# Altium PCB HMC1053-array.PcbDoc (part 1 of 4)
Units mm, origin at the board's own origin, x right, y up, seen from the top; angles counter-clockwise.
Board outline 90 x 90 mm, 4 copper layers (Top Layer (Signal), Int1 (GND), Int2 (Signal), Bottom Layer (Signal)), stack 1.586 mm thick; 151 components, 306 nets, 1178 pads, 350 vias.
Unrouted connection lines stored in the file: 80.
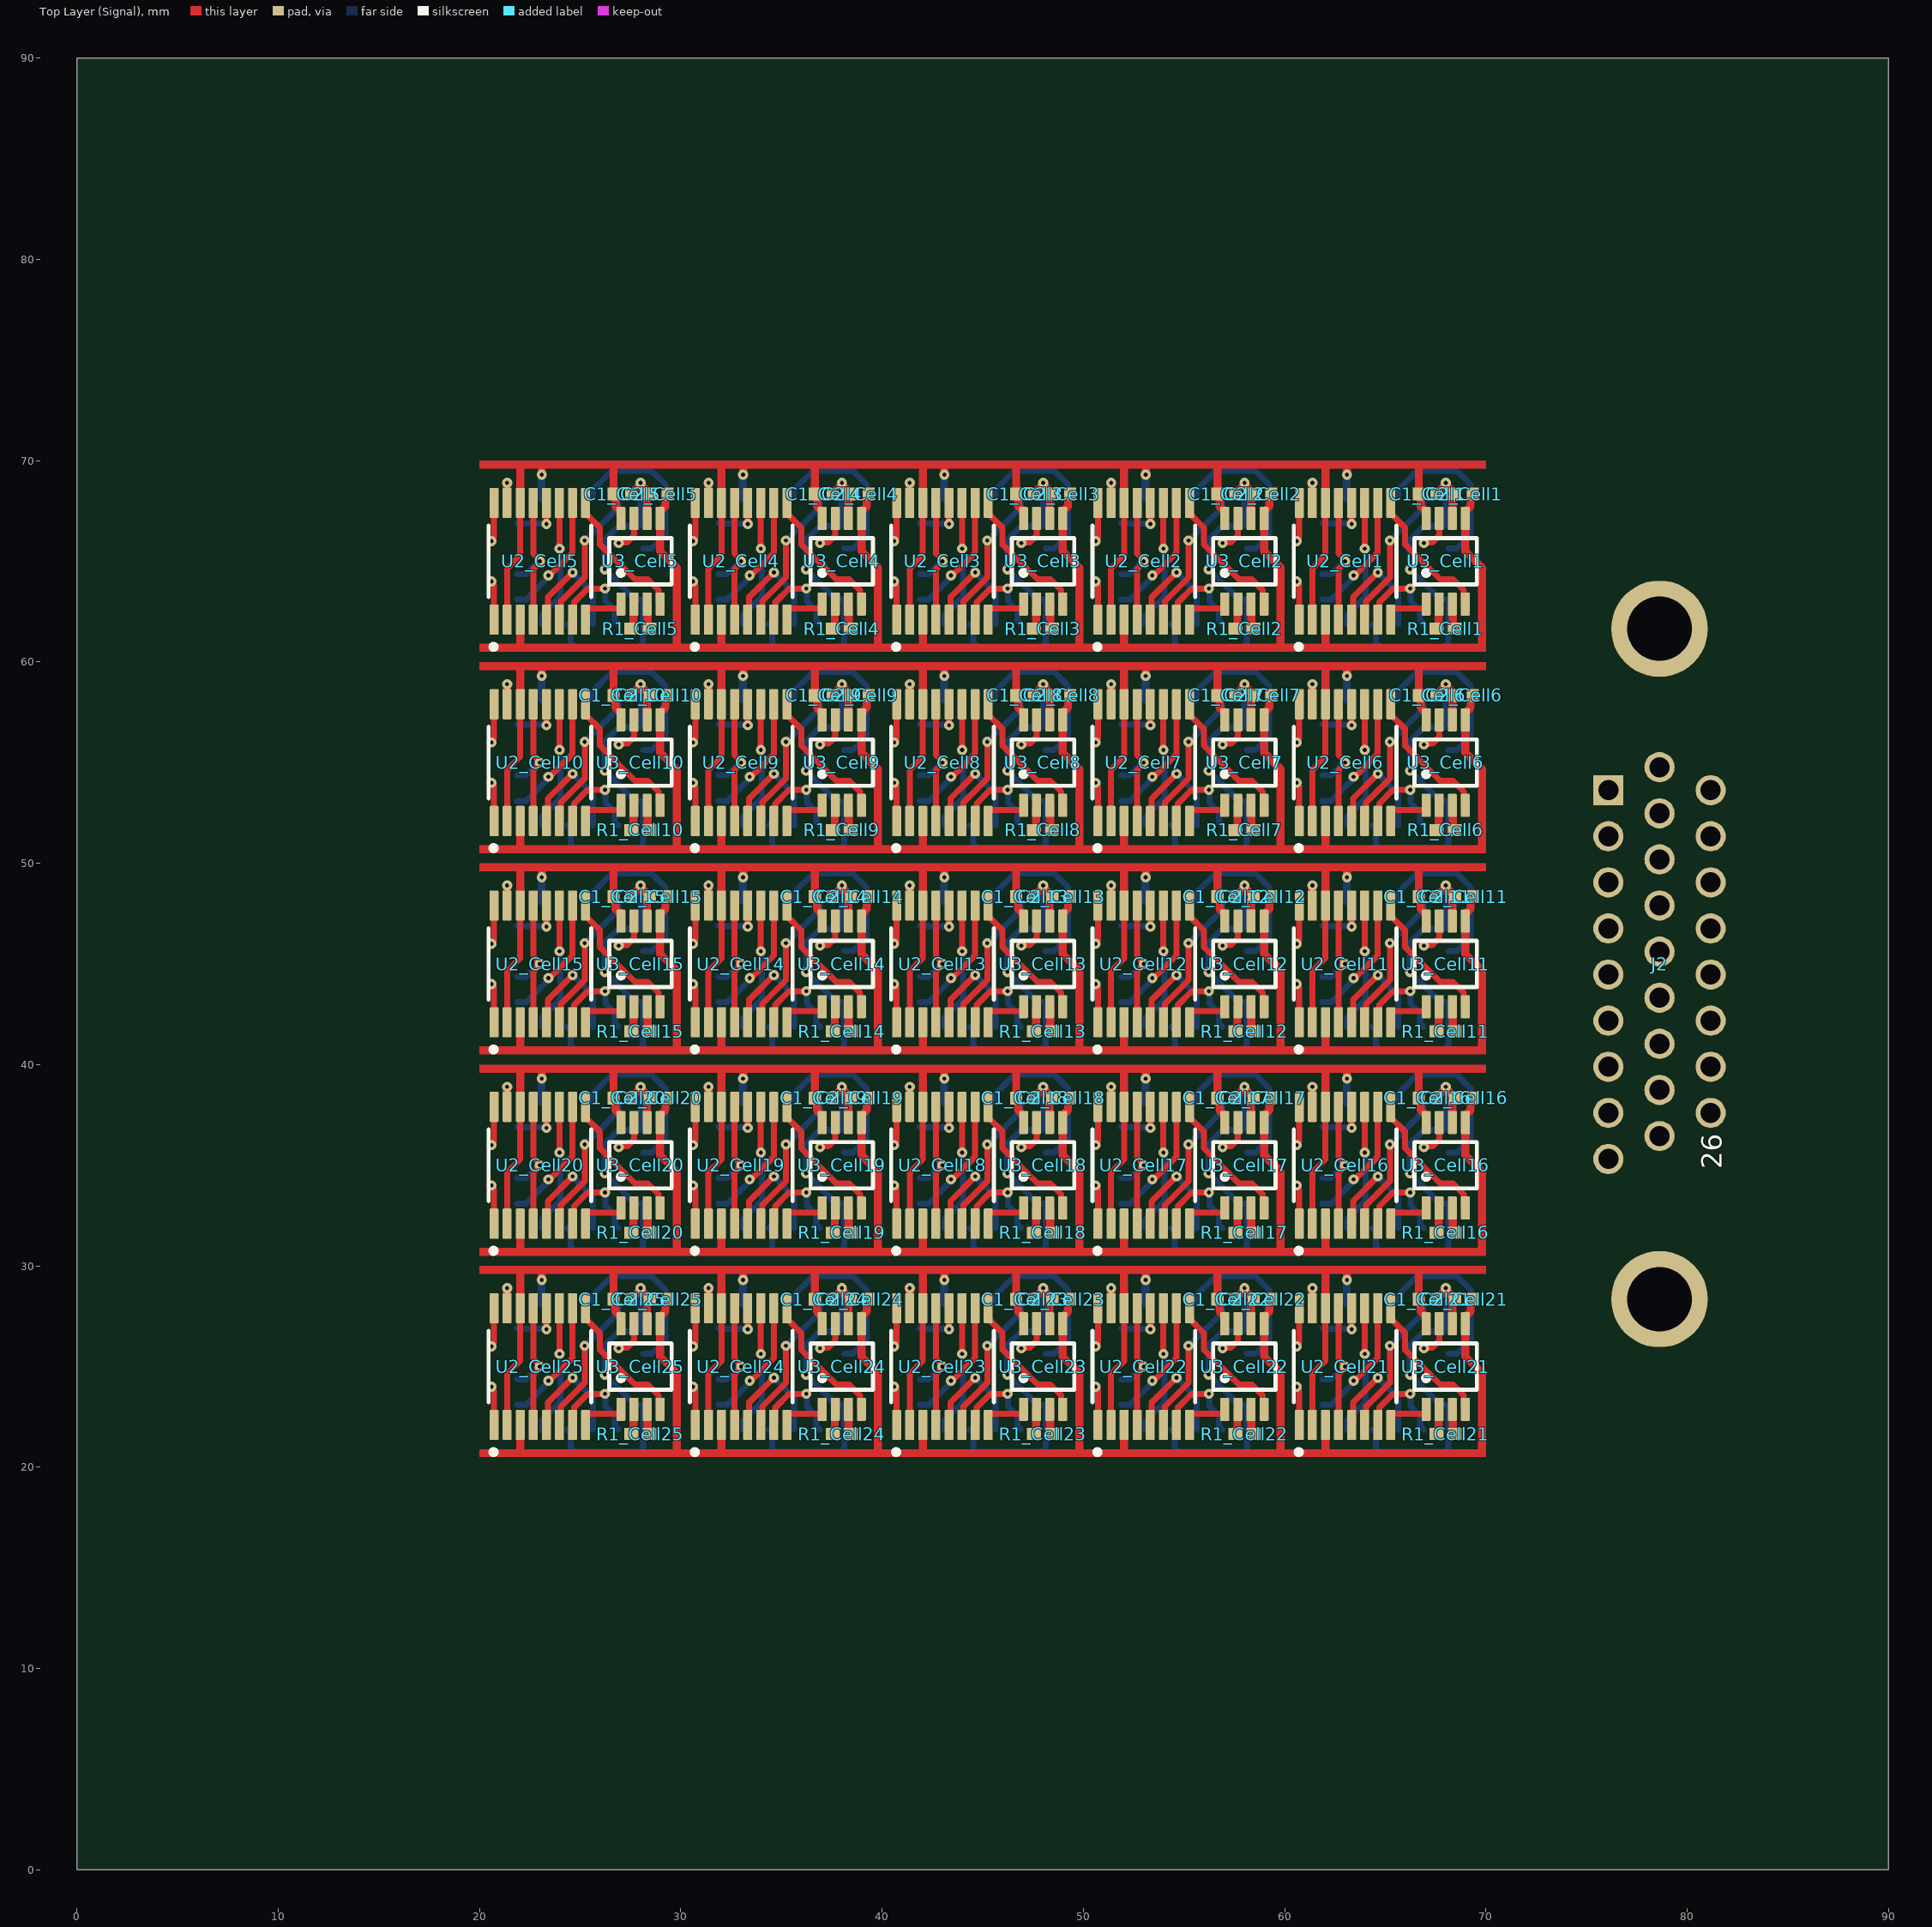
[diagram p0: Top Layer (Signal) view]
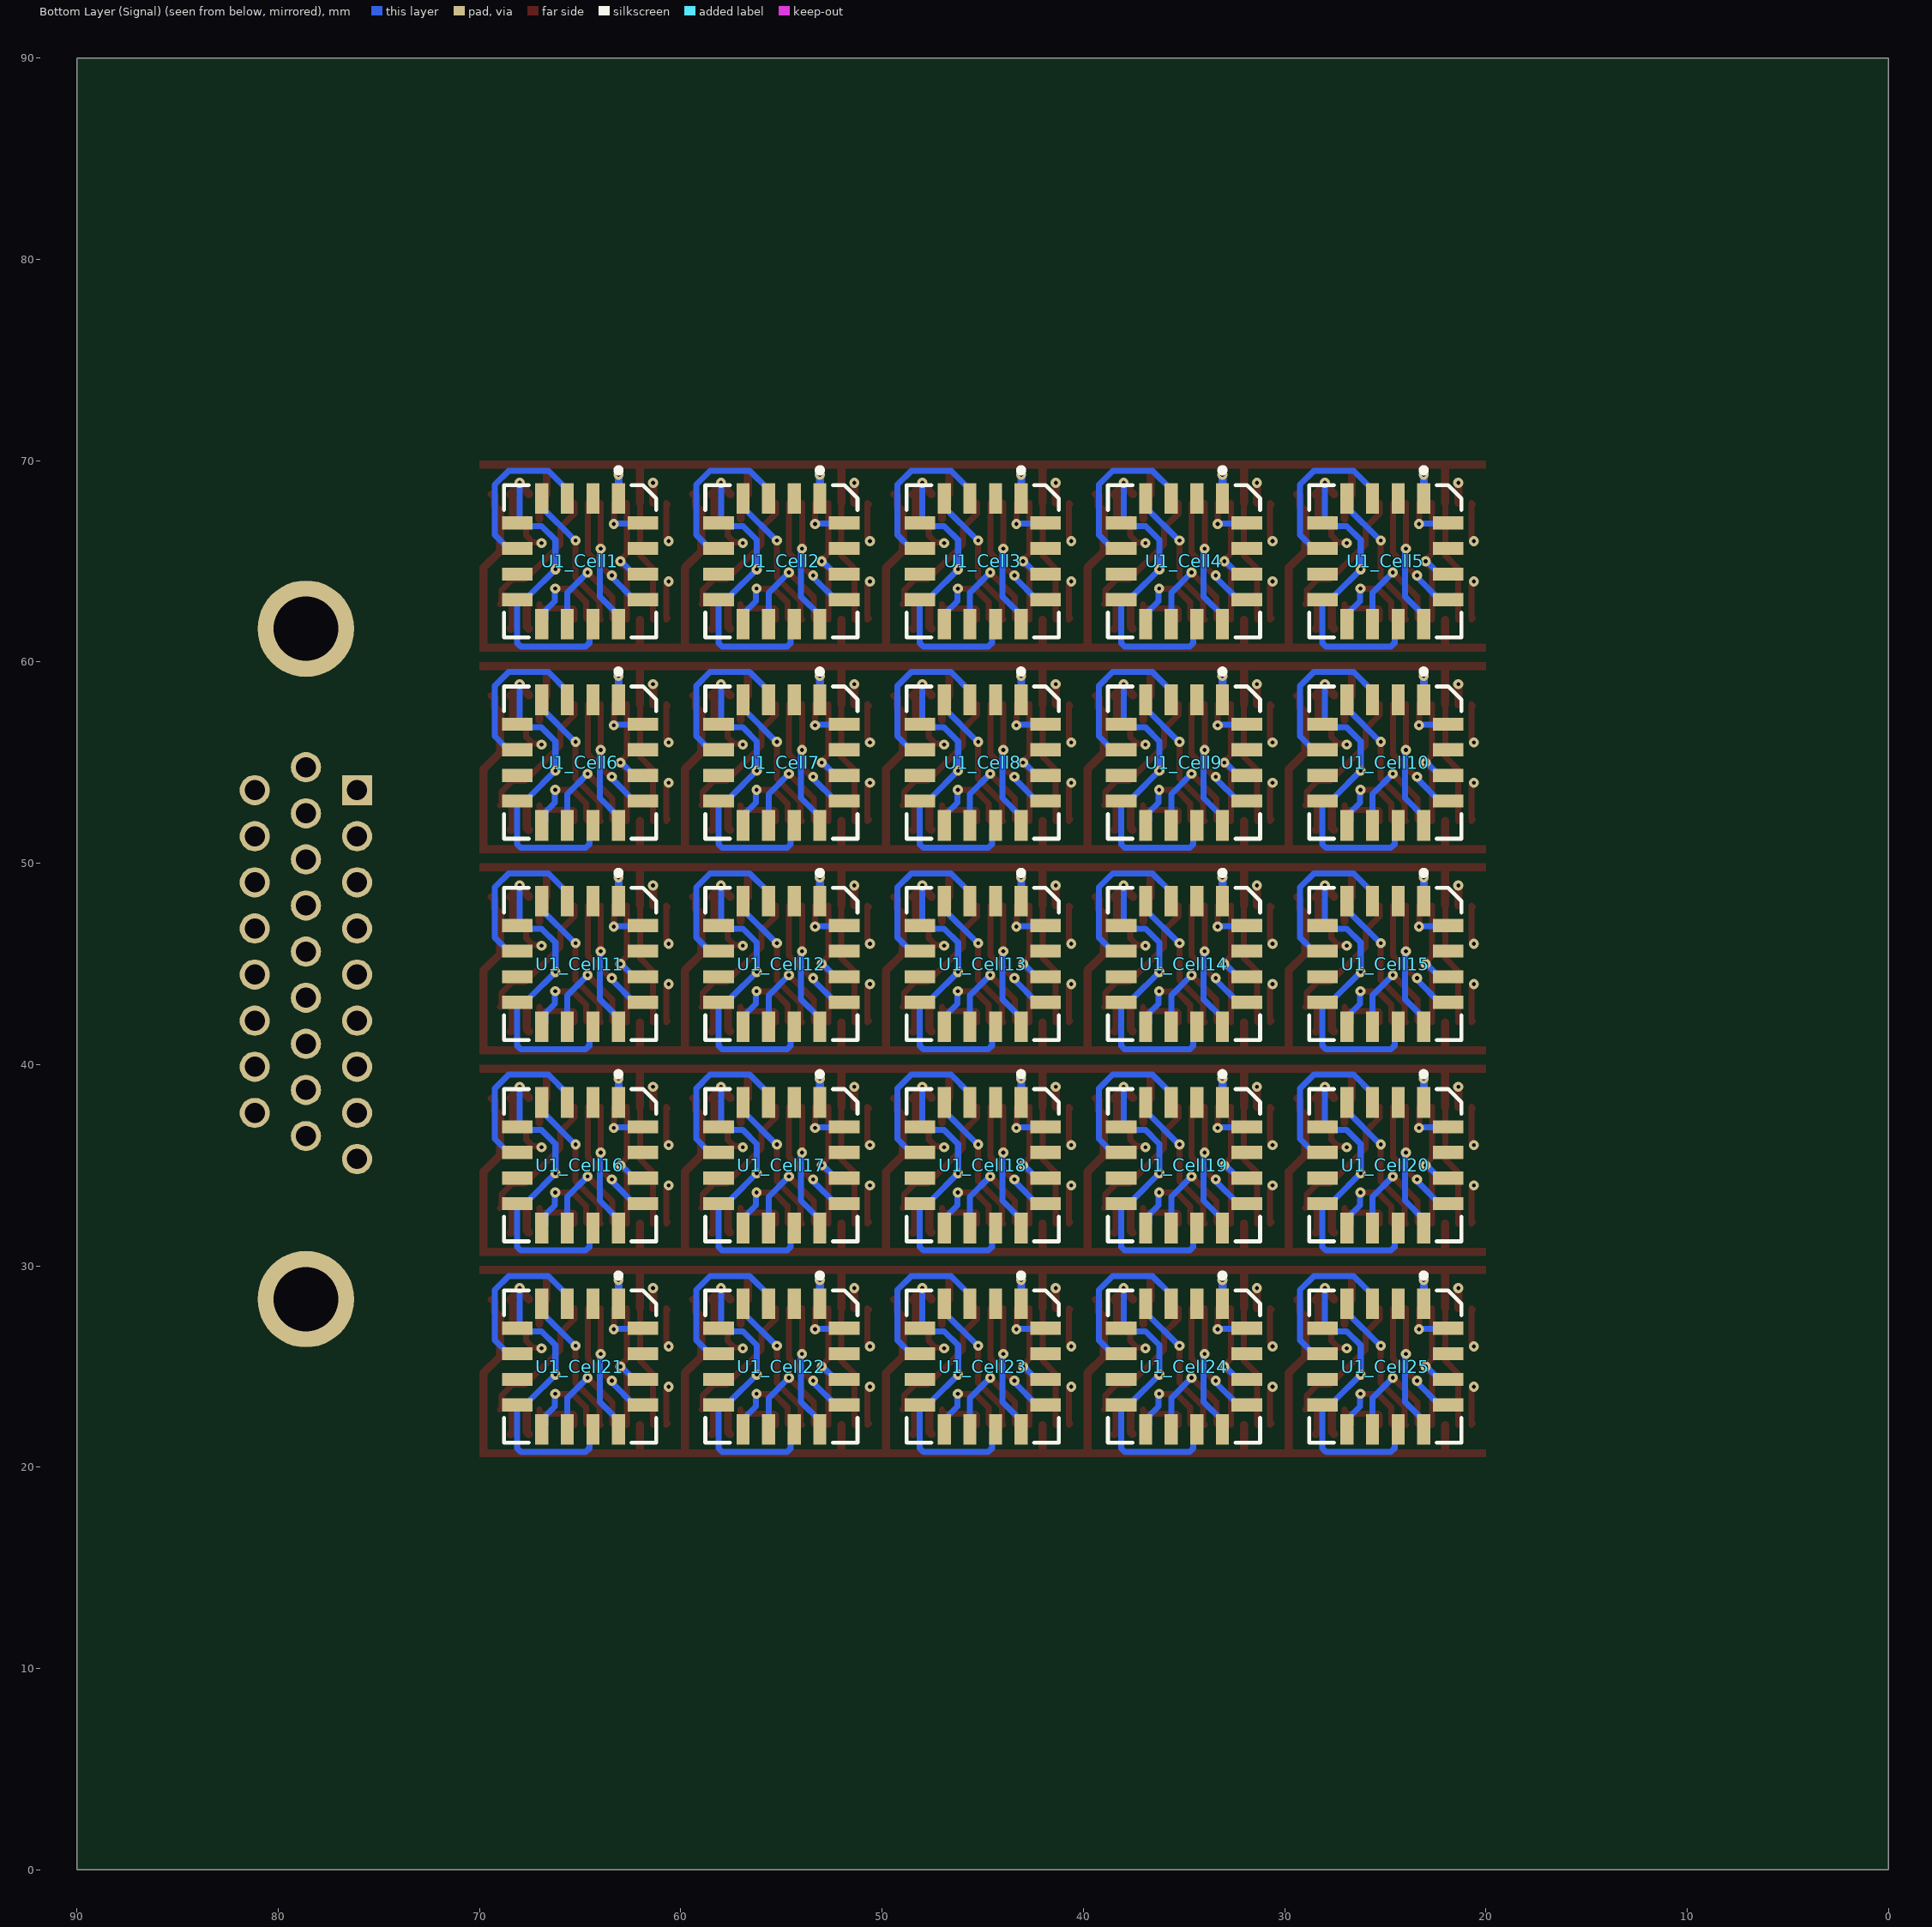
[diagram p1: Bottom Layer (Signal) view, seen from below]
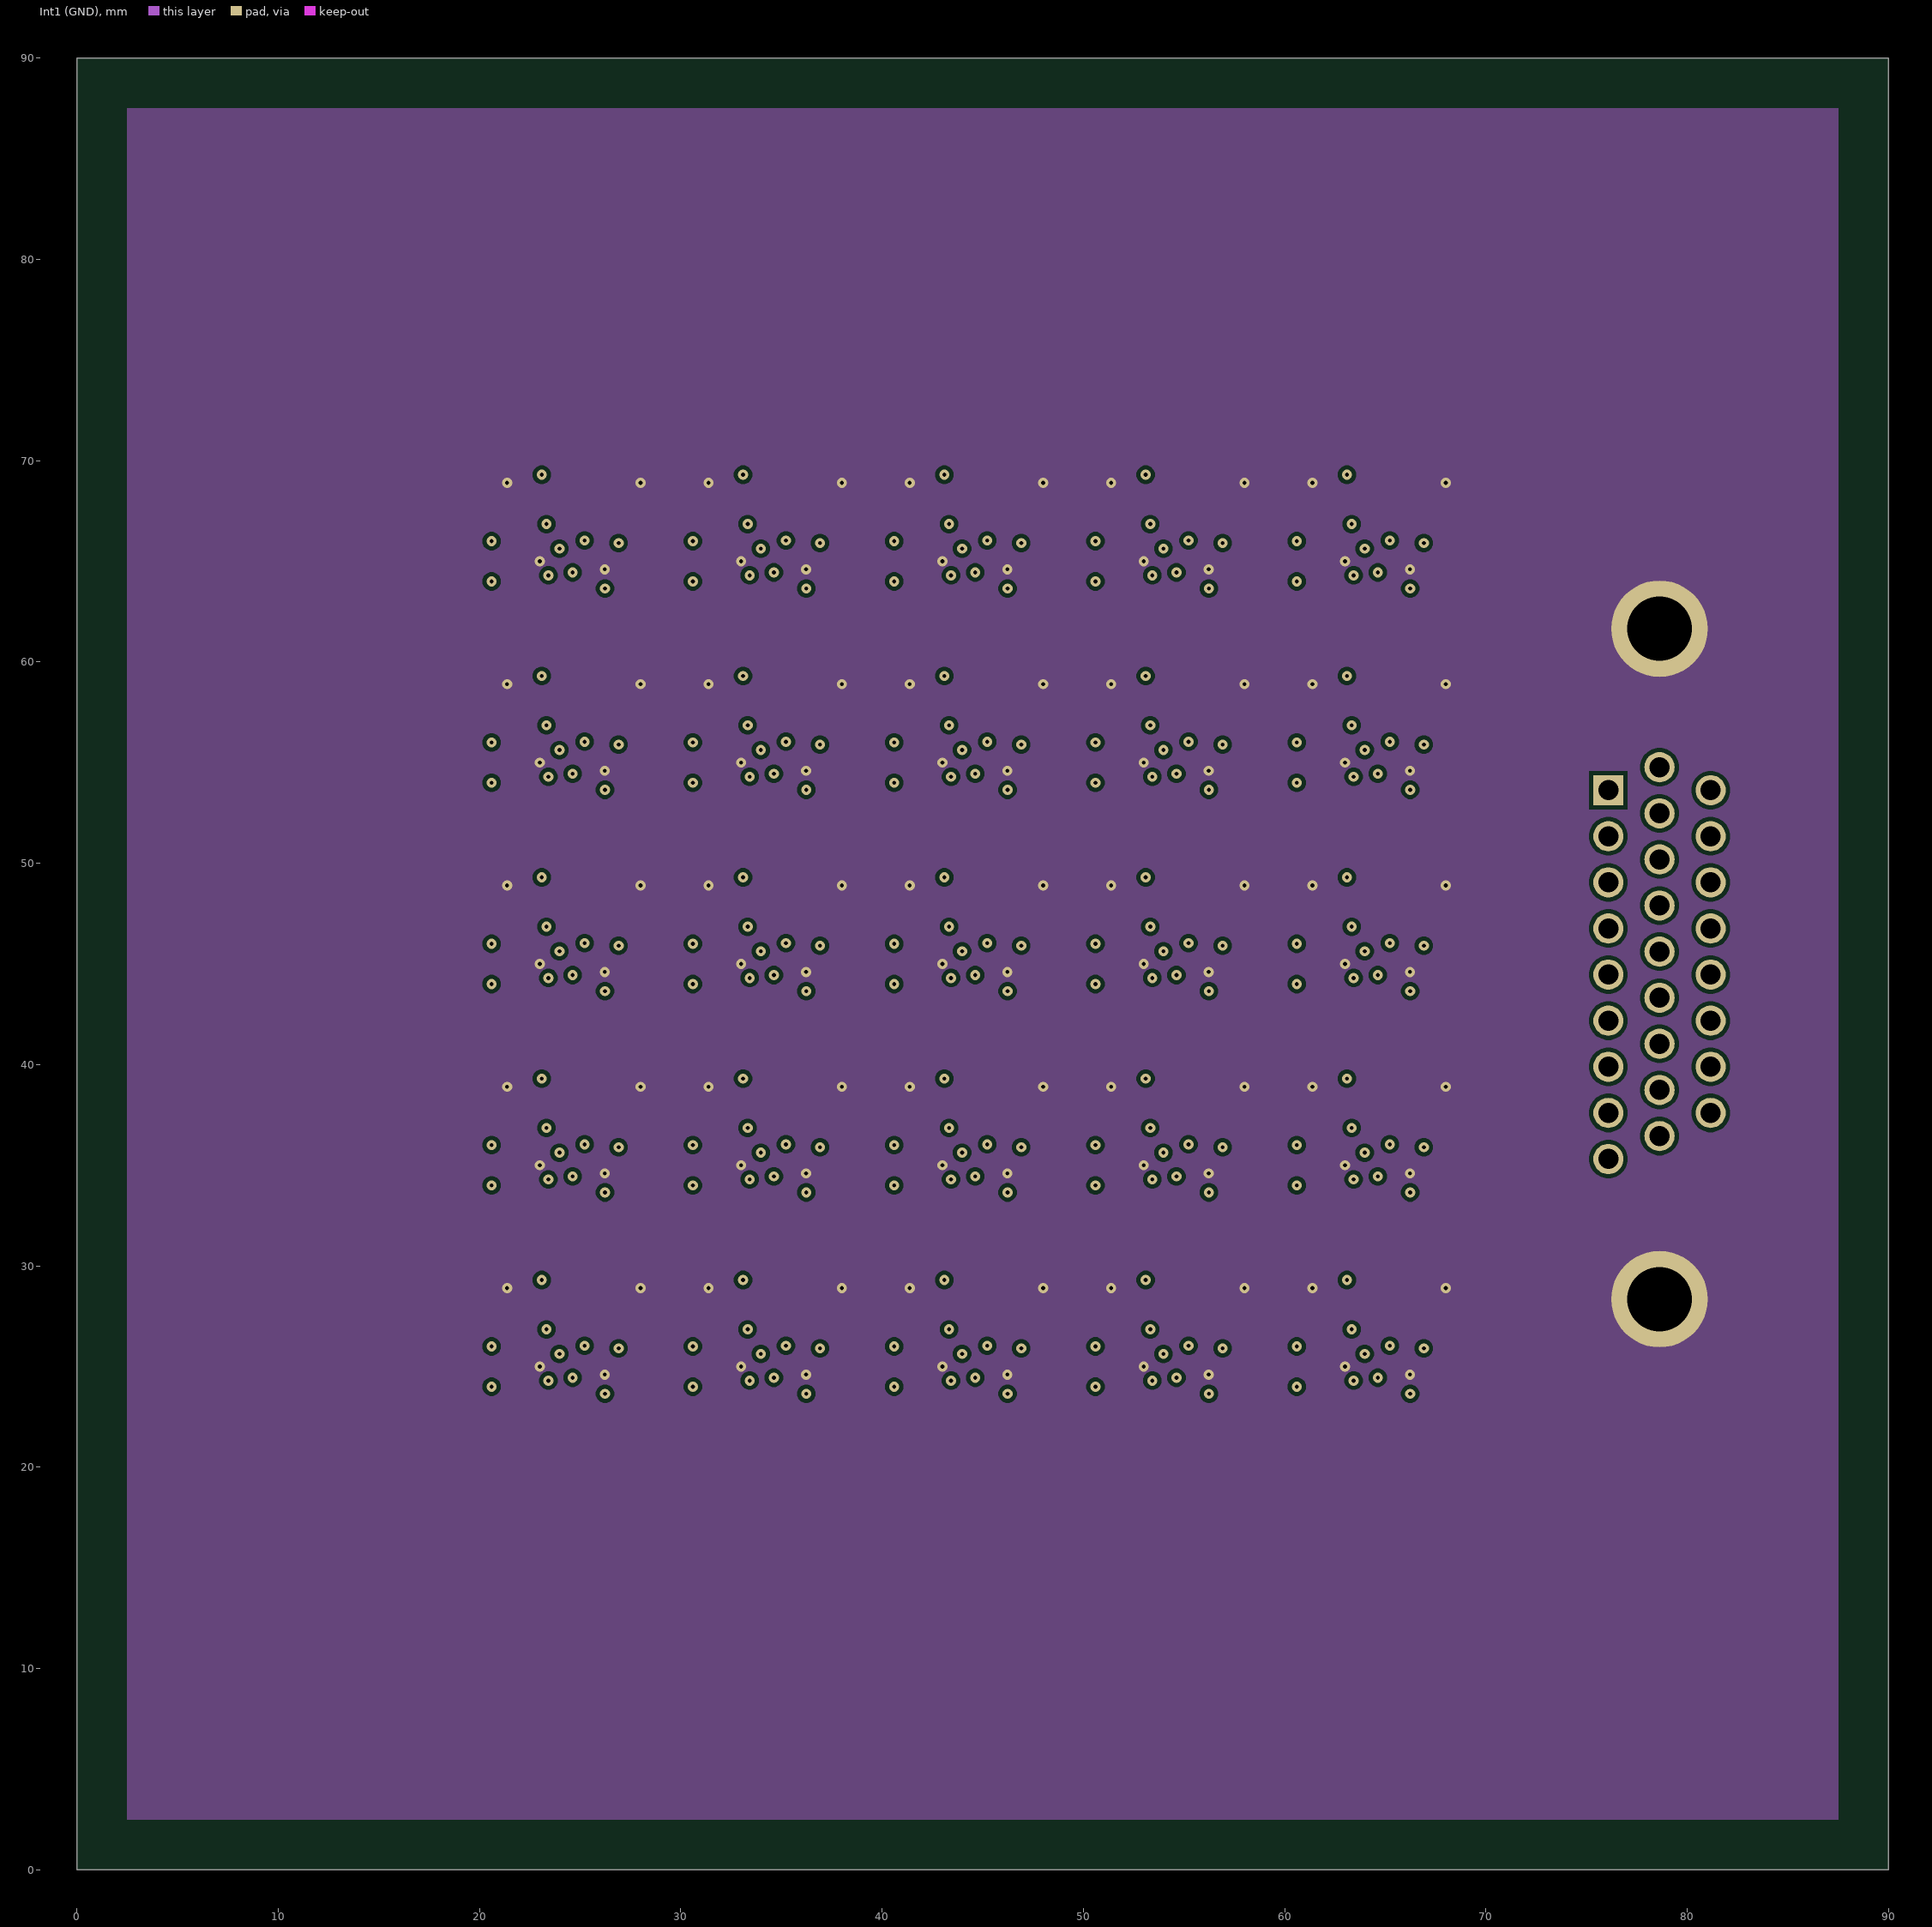
[diagram p2: Int1 (GND)]
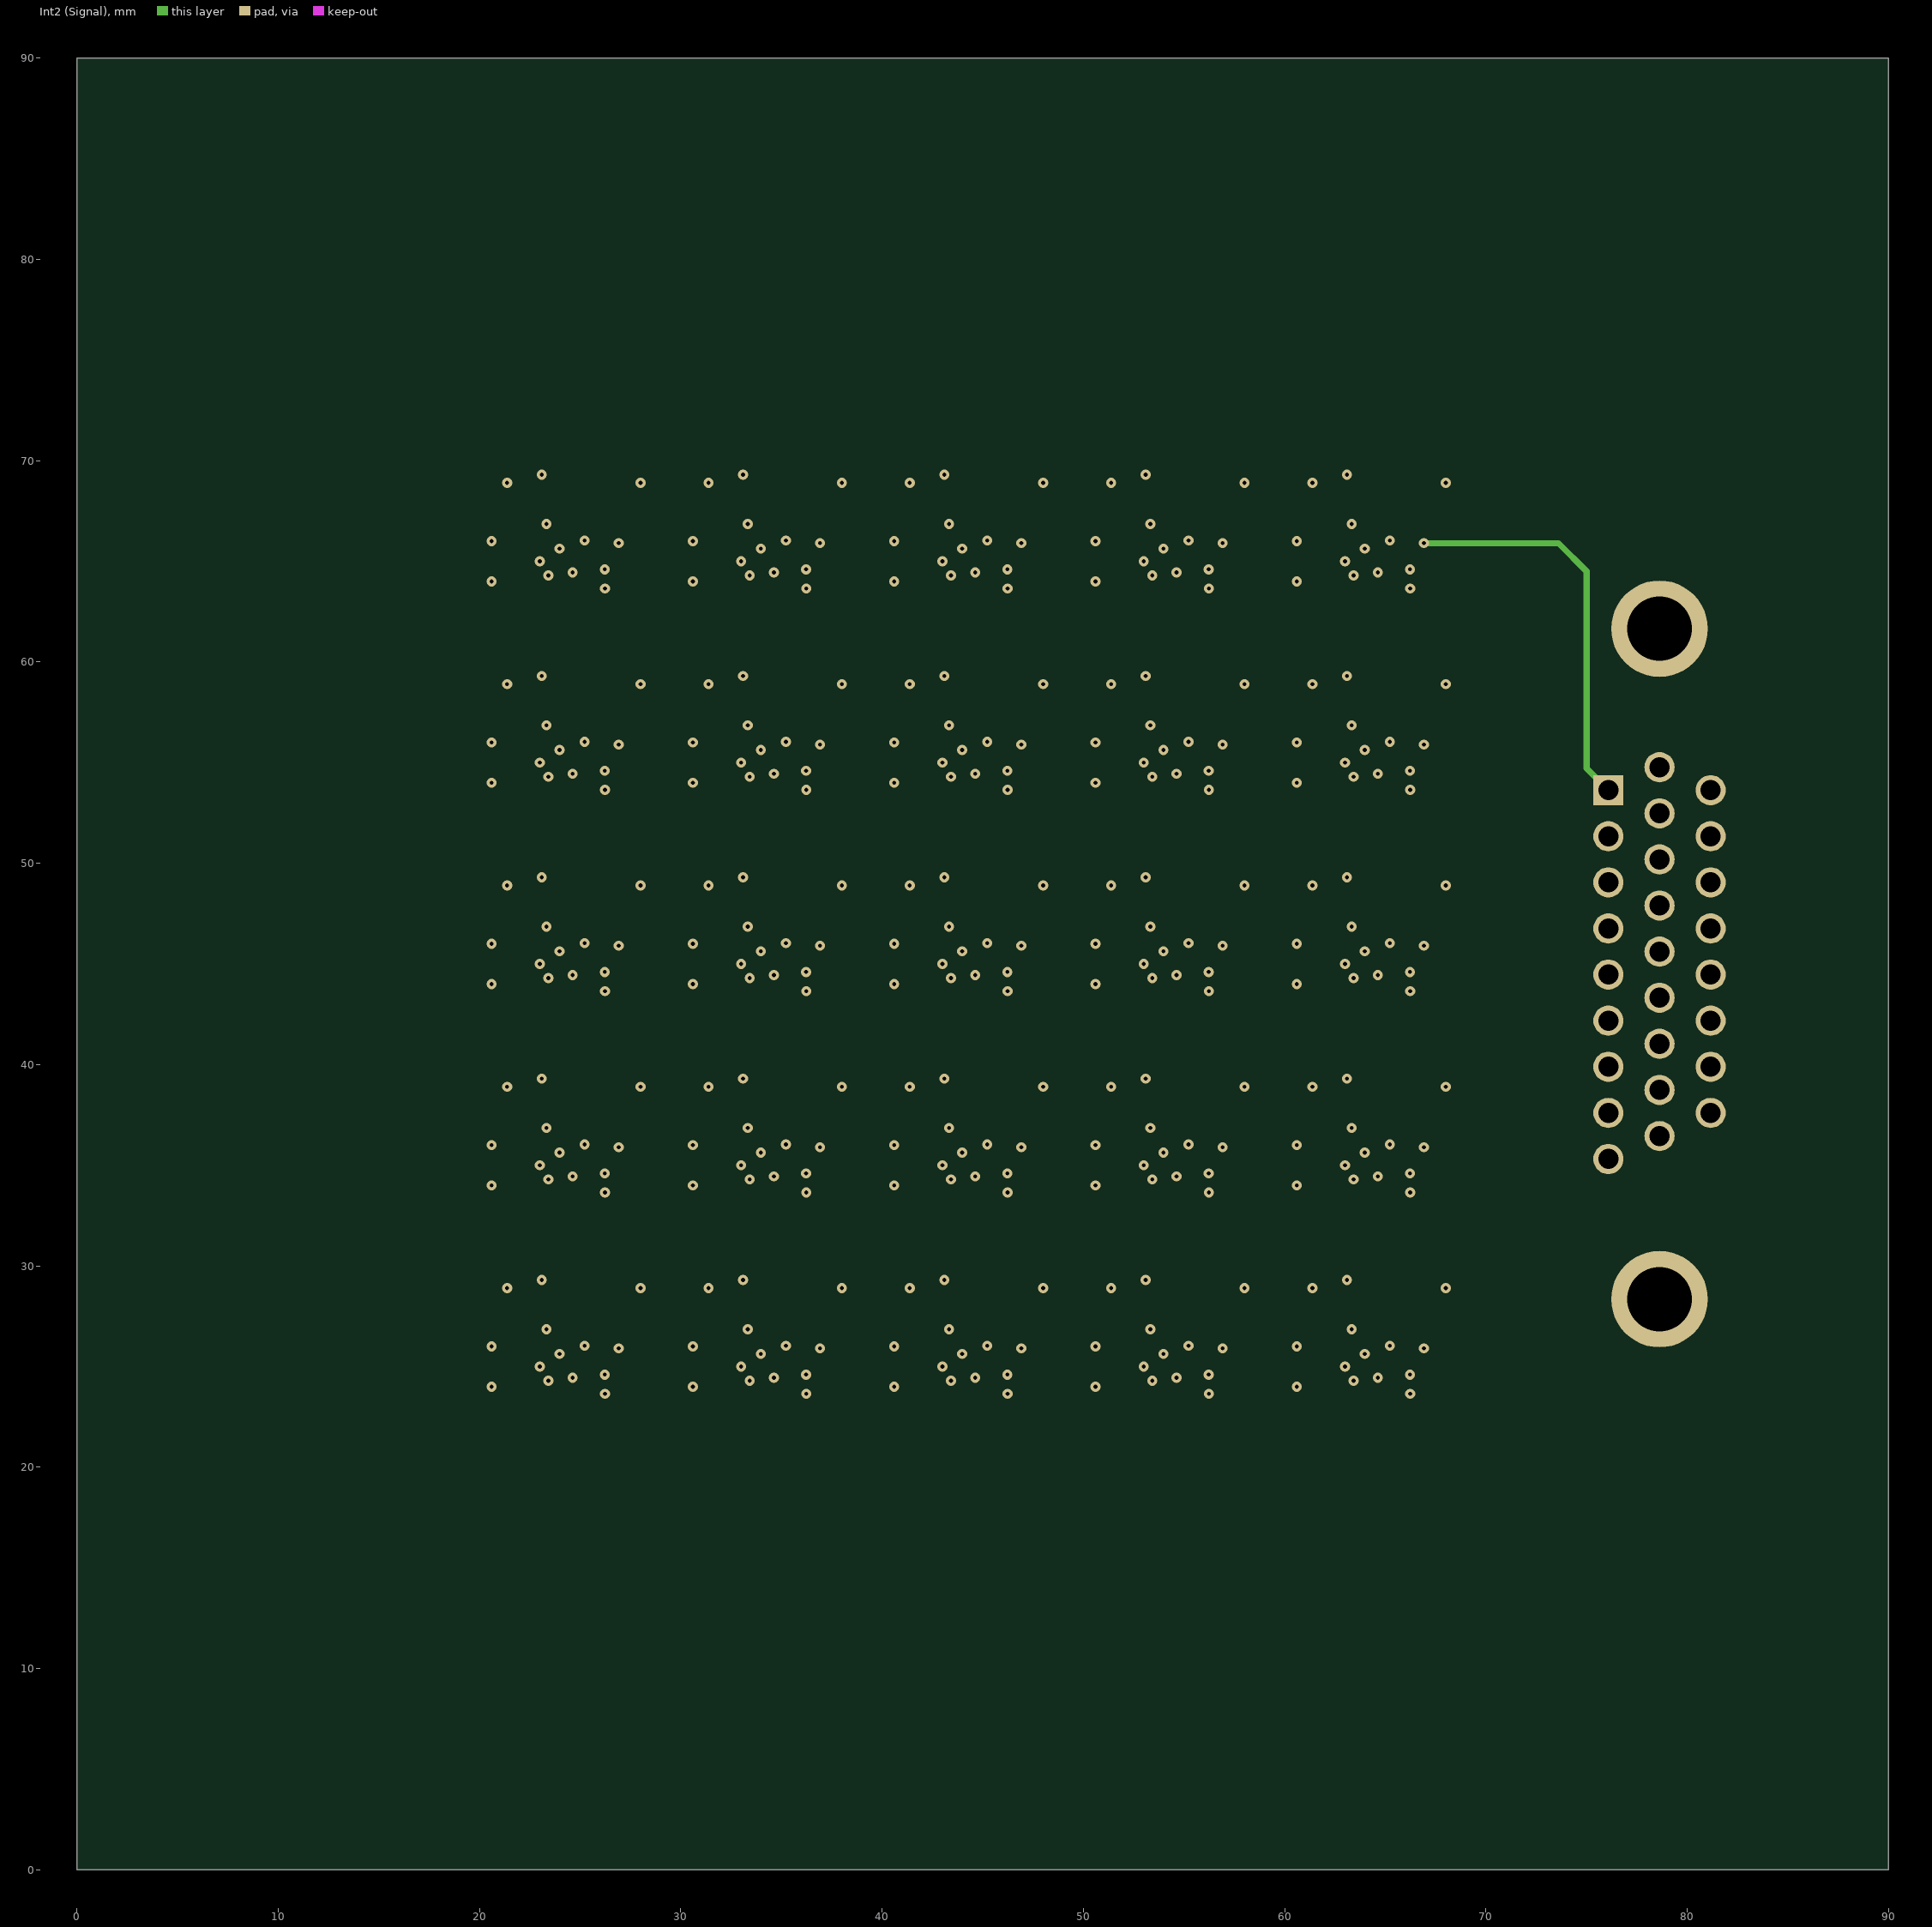
[diagram p3: Int2 (Signal)]

## Layer stack, top to bottom
Top Solder: solder mask 0.0254, SM-001, Dk 4
Top Layer (Signal): signal copper 0.035
Dielectric 1: prepreg 0.2104, PP-017, Dk 4.6
Int1 (GND): signal copper 0.0152
Dielectric 3: core 1.065, Core-039, Dk 4.6
Int2 (Signal): signal copper 0.0152
Dielectric 5: prepreg 0.2104, PP-017, Dk 4.6
Bottom Layer (Signal): signal copper 0.035
Bottom Solder: solder mask 0.0254, SM-001, Dk 4

## Board outline
0,0 0,90 90,90 90,0

## Design rules (kind name [scope] priority, off if disabled: settings)
Clearance [All] p1: gap=0.2 ignorepadtopadclearanceinfootprint=FALSE except(0.127: SMDPad-SMDPad)
HoleSize [All] p1: absolutevalues=TRUE maxlimit=6.3 minlimit=0.2 maxpercent=80.000 minpercent=20.000
PolygonConnect [All] p1: connectstyle=Direct reliefconductorwidth=0.254 reliefentries=4 polygonreliefangle="90 Angle" airgapwidth=0.254
RoomDefinition Cell5 [InComponentClass('Cell5')] p1: confinementstyle=ConfineIn formatcopy=TRUE lockcomponents=FALSE outline 20,60 30,60 30,70 20,70
RoomDefinition Cell4 [InComponentClass('Cell4')] p2: confinementstyle=ConfineIn formatcopy=TRUE lockcomponents=FALSE outline 30,60 40,60 40,70 30,70
RoomDefinition Cell3 [InComponentClass('Cell3')] p3: confinementstyle=ConfineIn formatcopy=TRUE lockcomponents=FALSE outline 40,60 50,60 50,70 40,70
RoomDefinition Cell2 [InComponentClass('Cell2')] p4: confinementstyle=ConfineIn formatcopy=TRUE lockcomponents=FALSE outline 50,60 60,60 60,70 50,70
RoomDefinition Cell7 [InComponentClass('Cell7')] p5: confinementstyle=ConfineIn formatcopy=TRUE lockcomponents=FALSE outline 50,50 60,50 60,60 50,60
RoomDefinition Cell20 [InComponentClass('Cell20')] p6: confinementstyle=ConfineIn formatcopy=TRUE lockcomponents=FALSE outline 20,30 30,30 30,40 20,40
RoomDefinition Cell8 [InComponentClass('Cell8')] p7: confinementstyle=ConfineIn formatcopy=TRUE lockcomponents=FALSE outline 40,50 50,50 50,60 40,60
RoomDefinition Cell12 [InComponentClass('Cell12')] p8: confinementstyle=ConfineIn formatcopy=TRUE lockcomponents=FALSE outline 50,40 60,40 60,50 50,50
RoomDefinition Cell17 [InComponentClass('Cell17')] p9: confinementstyle=ConfineIn formatcopy=TRUE lockcomponents=FALSE outline 50,30 60,30 60,40 50,40
RoomDefinition Cell24 [InComponentClass('Cell24')] p10: confinementstyle=ConfineIn formatcopy=TRUE lockcomponents=FALSE outline 30,20 40,20 40,30 30,30
RoomDefinition Cell19 [InComponentClass('Cell19')] p11: confinementstyle=ConfineIn formatcopy=TRUE lockcomponents=FALSE outline 30,30 40,30 40,40 30,40
RoomDefinition Cell23 [InComponentClass('Cell23')] p12: confinementstyle=ConfineIn formatcopy=TRUE lockcomponents=FALSE outline 40,20 50,20 50,30 40,30
RoomDefinition Cell18 [InComponentClass('Cell18')] p13: confinementstyle=ConfineIn formatcopy=TRUE lockcomponents=FALSE outline 40,30 50,30 50,40 40,40
RoomDefinition Cell14 [InComponentClass('Cell14')] p14: confinementstyle=ConfineIn formatcopy=TRUE lockcomponents=FALSE outline 30,40 40,40 40,50 30,50
RoomDefinition Cell22 [InComponentClass('Cell22')] p15: confinementstyle=ConfineIn formatcopy=TRUE lockcomponents=FALSE outline 50,20 60,20 60,30 50,30
RoomDefinition Cell13 [InComponentClass('Cell13')] p16: confinementstyle=ConfineIn formatcopy=TRUE lockcomponents=FALSE outline 40,40 50,40 50,50 40,50
RoomDefinition Cell10 [InComponentClass('Cell10')] p17: confinementstyle=ConfineIn formatcopy=TRUE lockcomponents=FALSE outline 20,50 30,50 30,60 20,60
RoomDefinition Cell15 [InComponentClass('Cell15')] p18: confinementstyle=ConfineIn formatcopy=TRUE lockcomponents=FALSE outline 20,40 30,40 30,50 20,50
RoomDefinition Cell6 [InComponentClass('Cell6')] p19: confinementstyle=ConfineIn formatcopy=TRUE lockcomponents=FALSE outline 60,50 70,50 70,60 60,60
RoomDefinition Cell16 [InComponentClass('Cell16')] p20: confinementstyle=ConfineIn formatcopy=TRUE lockcomponents=FALSE outline 60,30 70,30 70,40 60,40
RoomDefinition Cell21 [InComponentClass('Cell21')] p21: confinementstyle=ConfineIn formatcopy=TRUE lockcomponents=FALSE outline 60,20 70,20 70,30 60,30
RoomDefinition Cell11 [InComponentClass('Cell11')] p22: confinementstyle=ConfineIn formatcopy=TRUE lockcomponents=FALSE outline 60,40 70,40 70,50 60,50
RoomDefinition Cell1 [InComponentClass('Cell1')] p23: confinementstyle=ConfineIn formatcopy=TRUE lockcomponents=FALSE outline 60,60 70,60 70,70 60,70
RoomDefinition Cell25 [InComponentClass('Cell25')] p24: confinementstyle=ConfineIn formatcopy=TRUE lockcomponents=FALSE outline 20,20 30,20 30,30 20,30
RoomDefinition Cell9 [InComponentClass('Cell9')] p25: confinementstyle=ConfineIn formatcopy=TRUE lockcomponents=FALSE outline 30,50 40,50 40,60 30,60
RoutingVias [All] p1: holewidth=0.5 width=0.2 viastyle="Through Hole" minholewidth=0.45 minwidth=0.2 maxholewidth=1 maxwidth=0.6
SolderMaskExpansion [All] p1: expansion=0.102 istentingtop=FALSE
Width [All] p1: maxlimit=1 minlimit=0.127 preferedwidth=0.3
29 further rules are at their usual default settings.

## Classes and differential pairs
channel class HMC1053-cell: Cell1 Cell2 Cell3 Cell4 Cell5 Cell6 Cell7 Cell8 Cell9 Cell10 Cell11 Cell12 Cell13 Cell14 Cell15 Cell16 Cell17 Cell18 Cell19 Cell20 Cell21 Cell22 Cell23 Cell24 Cell25
component class HMC1053-array: J2
component class Cell25: C1_Cell25 C2_Cell25 R1_Cell25 U1_Cell25 U2_Cell25 U3_Cell25
component class Cell24: C1_Cell24 C2_Cell24 R1_Cell24 U1_Cell24 U2_Cell24 U3_Cell24
component class Cell23: C1_Cell23 C2_Cell23 R1_Cell23 U1_Cell23 U2_Cell23 U3_Cell23
component class Cell22: C1_Cell22 C2_Cell22 R1_Cell22 U1_Cell22 U2_Cell22 U3_Cell22
component class Cell21: C1_Cell21 C2_Cell21 R1_Cell21 U1_Cell21 U2_Cell21 U3_Cell21
component class Cell20: C1_Cell20 C2_Cell20 R1_Cell20 U1_Cell20 U2_Cell20 U3_Cell20
component class Cell19: C1_Cell19 C2_Cell19 R1_Cell19 U1_Cell19 U2_Cell19 U3_Cell19
component class Cell18: C1_Cell18 C2_Cell18 R1_Cell18 U1_Cell18 U2_Cell18 U3_Cell18
component class Cell17: C1_Cell17 C2_Cell17 R1_Cell17 U1_Cell17 U2_Cell17 U3_Cell17
component class Cell16: C1_Cell16 C2_Cell16 R1_Cell16 U1_Cell16 U2_Cell16 U3_Cell16
component class Cell15: C1_Cell15 C2_Cell15 R1_Cell15 U1_Cell15 U2_Cell15 U3_Cell15
component class Cell14: C1_Cell14 C2_Cell14 R1_Cell14 U1_Cell14 U2_Cell14 U3_Cell14
component class Cell13: C1_Cell13 C2_Cell13 R1_Cell13 U1_Cell13 U2_Cell13 U3_Cell13
component class Cell12: C1_Cell12 C2_Cell12 R1_Cell12 U1_Cell12 U2_Cell12 U3_Cell12
component class Cell11: C1_Cell11 C2_Cell11 R1_Cell11 U1_Cell11 U2_Cell11 U3_Cell11
component class Cell10: C1_Cell10 C2_Cell10 R1_Cell10 U1_Cell10 U2_Cell10 U3_Cell10
component class Cell9: C1_Cell9 C2_Cell9 R1_Cell9 U1_Cell9 U2_Cell9 U3_Cell9
component class Cell8: C1_Cell8 C2_Cell8 R1_Cell8 U1_Cell8 U2_Cell8 U3_Cell8
component class Cell7: C1_Cell7 C2_Cell7 R1_Cell7 U1_Cell7 U2_Cell7 U3_Cell7
component class Cell6: C1_Cell6 C2_Cell6 R1_Cell6 U1_Cell6 U2_Cell6 U3_Cell6
component class Cell5: C1_Cell5 C2_Cell5 R1_Cell5 U1_Cell5 U2_Cell5 U3_Cell5
component class Cell4: C1_Cell4 C2_Cell4 R1_Cell4 U1_Cell4 U2_Cell4 U3_Cell4
component class Cell3: C1_Cell3 C2_Cell3 R1_Cell3 U1_Cell3 U2_Cell3 U3_Cell3
component class Cell2: C1_Cell2 C2_Cell2 R1_Cell2 U1_Cell2 U2_Cell2 U3_Cell2
component class Cell1: C1_Cell1 C2_Cell1 R1_Cell1 U1_Cell1 U2_Cell1 U3_Cell1

## Components (designator, comment, footprint, x,y, rotation, side; value= is the part's Value field where it differs from the comment)
C1_Cell1 "1u" CAP_0402 67.1,68.335 r180 top (schematic designator C1)
C1_Cell2 "1u" CAP_0402 57.1,68.335 r180 top (schematic designator C1)
C1_Cell3 "1u" CAP_0402 47.1,68.335 r180 top (schematic designator C1)
C1_Cell4 "1u" CAP_0402 37.1,68.335 r180 top (schematic designator C1)
C1_Cell5 "1u" CAP_0402 27.1,68.335 r180 top (schematic designator C1)
C1_Cell6 "1u" CAP_0402 67.1,58.335 r180 top (schematic designator C1)
C1_Cell7 "1u" CAP_0402 57.1,58.335 r180 top (schematic designator C1)
C1_Cell8 "1u" CAP_0402 47.1,58.335 r180 top (schematic designator C1)
C1_Cell9 "1u" CAP_0402 37.1,58.335 r180 top (schematic designator C1)
C1_Cell10 "1u" CAP_0402 27.1,58.335 r180 top (schematic designator C1)
C1_Cell11 "1u" CAP_0402 67.1,48.335 r180 top (schematic designator C1)
C1_Cell12 "1u" CAP_0402 57.1,48.335 r180 top (schematic designator C1)
C1_Cell13 "1u" CAP_0402 47.1,48.335 r180 top (schematic designator C1)
C1_Cell14 "1u" CAP_0402 37.1,48.335 r180 top (schematic designator C1)
C1_Cell15 "1u" CAP_0402 27.1,48.335 r180 top (schematic designator C1)
C1_Cell16 "1u" CAP_0402 67.1,38.335 r180 top (schematic designator C1)
C1_Cell17 "1u" CAP_0402 57.1,38.335 r180 top (schematic designator C1)
C1_Cell18 "1u" CAP_0402 47.1,38.335 r180 top (schematic designator C1)
C1_Cell19 "1u" CAP_0402 37.1,38.335 r180 top (schematic designator C1)
C1_Cell20 "1u" CAP_0402 27.1,38.335 r180 top (schematic designator C1)
C1_Cell21 "1u" CAP_0402 67.1,28.335 r180 top (schematic designator C1)
C1_Cell22 "1u" CAP_0402 57.1,28.335 r180 top (schematic designator C1)
C1_Cell23 "1u" CAP_0402 47.1,28.335 r180 top (schematic designator C1)
C1_Cell24 "1u" CAP_0402 37.1,28.335 r180 top (schematic designator C1)
C1_Cell25 "1u" CAP_0402 27.1,28.335 r180 top (schematic designator C1)
C2_Cell1 "1u" CAP_0402 68.9,68.335 r180 top (schematic designator C2)
C2_Cell2 "1u" CAP_0402 58.9,68.335 r180 top (schematic designator C2)
C2_Cell3 "1u" CAP_0402 48.9,68.335 r180 top (schematic designator C2)
C2_Cell4 "1u" CAP_0402 38.9,68.335 r180 top (schematic designator C2)
C2_Cell5 "1u" CAP_0402 28.9,68.335 r180 top (schematic designator C2)
C2_Cell6 "1u" CAP_0402 68.9,58.335 r180 top (schematic designator C2)
C2_Cell7 "1u" CAP_0402 58.9,58.335 r180 top (schematic designator C2)
C2_Cell8 "1u" CAP_0402 48.9,58.335 r180 top (schematic designator C2)
C2_Cell9 "1u" CAP_0402 38.9,58.335 r180 top (schematic designator C2)
C2_Cell10 "1u" CAP_0402 28.9,58.335 r180 top (schematic designator C2)
C2_Cell11 "1u" CAP_0402 68.9,48.335 r180 top (schematic designator C2)
C2_Cell12 "1u" CAP_0402 58.9,48.335 r180 top (schematic designator C2)
C2_Cell13 "1u" CAP_0402 48.9,48.335 r180 top (schematic designator C2)
C2_Cell14 "1u" CAP_0402 38.9,48.335 r180 top (schematic designator C2)
C2_Cell15 "1u" CAP_0402 28.9,48.335 r180 top (schematic designator C2)
C2_Cell16 "1u" CAP_0402 68.9,38.335 r180 top (schematic designator C2)
C2_Cell17 "1u" CAP_0402 58.9,38.335 r180 top (schematic designator C2)
C2_Cell18 "1u" CAP_0402 48.9,38.335 r180 top (schematic designator C2)
C2_Cell19 "1u" CAP_0402 38.9,38.335 r180 top (schematic designator C2)
C2_Cell20 "1u" CAP_0402 28.9,38.335 r180 top (schematic designator C2)
C2_Cell21 "1u" CAP_0402 68.9,28.335 r180 top (schematic designator C2)
C2_Cell22 "1u" CAP_0402 58.9,28.335 r180 top (schematic designator C2)
C2_Cell23 "1u" CAP_0402 48.9,28.335 r180 top (schematic designator C2)
C2_Cell24 "1u" CAP_0402 38.9,28.335 r180 top (schematic designator C2)
C2_Cell25 "1u" CAP_0402 28.9,28.335 r180 top (schematic designator C2)
J2 "D-sub_26" D-SUB_26 81.9,45 r90 top
R1_Cell1 "249R" RES_0402 68,61.65 r0 top (schematic designator R1)
R1_Cell2 "249R" RES_0402 58,61.65 r0 top (schematic designator R1)
R1_Cell3 "249R" RES_0402 48,61.65 r0 top (schematic designator R1)
R1_Cell4 "249R" RES_0402 38,61.65 r0 top (schematic designator R1)
R1_Cell5 "249R" RES_0402 28,61.65 r0 top (schematic designator R1)
R1_Cell6 "249R" RES_0402 68,51.65 r0 top (schematic designator R1)
R1_Cell7 "249R" RES_0402 58,51.65 r0 top (schematic designator R1)
R1_Cell8 "249R" RES_0402 48,51.65 r0 top (schematic designator R1)
R1_Cell9 "249R" RES_0402 38,51.65 r0 top (schematic designator R1)
R1_Cell10 "249R" RES_0402 28,51.65 r0 top (schematic designator R1)
R1_Cell11 "249R" RES_0402 68,41.65 r0 top (schematic designator R1)
R1_Cell12 "249R" RES_0402 58,41.65 r0 top (schematic designator R1)
R1_Cell13 "249R" RES_0402 48,41.65 r0 top (schematic designator R1)
R1_Cell14 "249R" RES_0402 38,41.65 r0 top (schematic designator R1)
R1_Cell15 "249R" RES_0402 28,41.65 r0 top (schematic designator R1)
R1_Cell16 "249R" RES_0402 68,31.65 r0 top (schematic designator R1)
R1_Cell17 "249R" RES_0402 58,31.65 r0 top (schematic designator R1)
R1_Cell18 "249R" RES_0402 48,31.65 r0 top (schematic designator R1)
R1_Cell19 "249R" RES_0402 38,31.65 r0 top (schematic designator R1)
R1_Cell20 "249R" RES_0402 28,31.65 r0 top (schematic designator R1)
R1_Cell21 "249R" RES_0402 68,21.65 r0 top (schematic designator R1)
R1_Cell22 "249R" RES_0402 58,21.65 r0 top (schematic designator R1)
R1_Cell23 "249R" RES_0402 48,21.65 r0 top (schematic designator R1)
R1_Cell24 "249R" RES_0402 38,21.65 r0 top (schematic designator R1)
R1_Cell25 "249R" RES_0402 28,21.65 r0 top (schematic designator R1)
U1_Cell1 "HMC1053" HMC1053 65,65 r270 bottom (schematic designator U1)
U1_Cell2 "HMC1053" HMC1053 55,65 r270 bottom (schematic designator U1)
U1_Cell3 "HMC1053" HMC1053 45,65 r270 bottom (schematic designator U1)
U1_Cell4 "HMC1053" HMC1053 35,65 r270 bottom (schematic designator U1)
U1_Cell5 "HMC1053" HMC1053 25,65 r270 bottom (schematic designator U1)
U1_Cell6 "HMC1053" HMC1053 65,55 r270 bottom (schematic designator U1)
U1_Cell7 "HMC1053" HMC1053 55,55 r270 bottom (schematic designator U1)
U1_Cell8 "HMC1053" HMC1053 45,55 r270 bottom (schematic designator U1)
U1_Cell9 "HMC1053" HMC1053 35,55 r270 bottom (schematic designator U1)
U1_Cell10 "HMC1053" HMC1053 25,55 r270 bottom (schematic designator U1)
U1_Cell11 "HMC1053" HMC1053 65,45 r270 bottom (schematic designator U1)
U1_Cell12 "HMC1053" HMC1053 55,45 r270 bottom (schematic designator U1)
U1_Cell13 "HMC1053" HMC1053 45,45 r270 bottom (schematic designator U1)
U1_Cell14 "HMC1053" HMC1053 35,45 r270 bottom (schematic designator U1)
U1_Cell15 "HMC1053" HMC1053 25,45 r270 bottom (schematic designator U1)
U1_Cell16 "HMC1053" HMC1053 65,35 r270 bottom (schematic designator U1)
U1_Cell17 "HMC1053" HMC1053 55,35 r270 bottom (schematic designator U1)
U1_Cell18 "HMC1053" HMC1053 45,35 r270 bottom (schematic designator U1)
U1_Cell19 "HMC1053" HMC1053 35,35 r270 bottom (schematic designator U1)
U1_Cell20 "HMC1053" HMC1053 25,35 r270 bottom (schematic designator U1)
U1_Cell21 "HMC1053" HMC1053 65,25 r270 bottom (schematic designator U1)
U1_Cell22 "HMC1053" HMC1053 55,25 r270 bottom (schematic designator U1)
U1_Cell23 "HMC1053" HMC1053 45,25 r270 bottom (schematic designator U1)
U1_Cell24 "HMC1053" HMC1053 35,25 r270 bottom (schematic designator U1)
U1_Cell25 "HMC1053" HMC1053 25,25 r270 bottom (schematic designator U1)
U2_Cell1 "MUX509IPW" MUX509IPW 63,65 r90 top (schematic designator U2)
U2_Cell2 "MUX509IPW" MUX509IPW 53,65 r90 top (schematic designator U2)
U2_Cell3 "MUX509IPW" MUX509IPW 43,65 r90 top (schematic designator U2)
U2_Cell4 "MUX509IPW" MUX509IPW 33,65 r90 top (schematic designator U2)
U2_Cell5 "MUX509IPW" MUX509IPW 23,65 r90 top (schematic designator U2)
U2_Cell6 "MUX509IPW" MUX509IPW 63,55 r90 top (schematic designator U2)
U2_Cell7 "MUX509IPW" MUX509IPW 53,55 r90 top (schematic designator U2)
U2_Cell8 "MUX509IPW" MUX509IPW 43,55 r90 top (schematic designator U2)
U2_Cell9 "MUX509IPW" MUX509IPW 33,55 r90 top (schematic designator U2)
U2_Cell10 "MUX509IPW" MUX509IPW 23,55 r90 top (schematic designator U2)
U2_Cell11 "MUX509IPW" MUX509IPW 63,45 r90 top (schematic designator U2)
U2_Cell12 "MUX509IPW" MUX509IPW 53,45 r90 top (schematic designator U2)
U2_Cell13 "MUX509IPW" MUX509IPW 43,45 r90 top (schematic designator U2)
U2_Cell14 "MUX509IPW" MUX509IPW 33,45 r90 top (schematic designator U2)
U2_Cell15 "MUX509IPW" MUX509IPW 23,45 r90 top (schematic designator U2)
U2_Cell16 "MUX509IPW" MUX509IPW 63,35 r90 top (schematic designator U2)
U2_Cell17 "MUX509IPW" MUX509IPW 53,35 r90 top (schematic designator U2)
U2_Cell18 "MUX509IPW" MUX509IPW 43,35 r90 top (schematic designator U2)
U2_Cell19 "MUX509IPW" MUX509IPW 33,35 r90 top (schematic designator U2)
U2_Cell20 "MUX509IPW" MUX509IPW 23,35 r90 top (schematic designator U2)
U2_Cell21 "MUX509IPW" MUX509IPW 63,25 r90 top (schematic designator U2)
U2_Cell22 "MUX509IPW" MUX509IPW 53,25 r90 top (schematic designator U2)
U2_Cell23 "MUX509IPW" MUX509IPW 43,25 r90 top (schematic designator U2)
U2_Cell24 "MUX509IPW" MUX509IPW 33,25 r90 top (schematic designator U2)
U2_Cell25 "MUX509IPW" MUX509IPW 23,25 r90 top (schematic designator U2)
U3_Cell1 "INA826AIDGK" INA826AIDGK 68,65 r90 top (schematic designator U3)
U3_Cell2 "INA826AIDGK" INA826AIDGK 58,65 r90 top (schematic designator U3)
U3_Cell3 "INA826AIDGK" INA826AIDGK 48,65 r90 top (schematic designator U3)
U3_Cell4 "INA826AIDGK" INA826AIDGK 38,65 r90 top (schematic designator U3)
U3_Cell5 "INA826AIDGK" INA826AIDGK 28,65 r90 top (schematic designator U3)
U3_Cell6 "INA826AIDGK" INA826AIDGK 68,55 r90 top (schematic designator U3)
U3_Cell7 "INA826AIDGK" INA826AIDGK 58,55 r90 top (schematic designator U3)
U3_Cell8 "INA826AIDGK" INA826AIDGK 48,55 r90 top (schematic designator U3)
U3_Cell9 "INA826AIDGK" INA826AIDGK 38,55 r90 top (schematic designator U3)
U3_Cell10 "INA826AIDGK" INA826AIDGK 28,55 r90 top (schematic designator U3)
U3_Cell11 "INA826AIDGK" INA826AIDGK 68,45 r90 top (schematic designator U3)
U3_Cell12 "INA826AIDGK" INA826AIDGK 58,45 r90 top (schematic designator U3)
U3_Cell13 "INA826AIDGK" INA826AIDGK 48,45 r90 top (schematic designator U3)
U3_Cell14 "INA826AIDGK" INA826AIDGK 38,45 r90 top (schematic designator U3)
U3_Cell15 "INA826AIDGK" INA826AIDGK 28,45 r90 top (schematic designator U3)
U3_Cell16 "INA826AIDGK" INA826AIDGK 68,35 r90 top (schematic designator U3)
U3_Cell17 "INA826AIDGK" INA826AIDGK 58,35 r90 top (schematic designator U3)
U3_Cell18 "INA826AIDGK" INA826AIDGK 48,35 r90 top (schematic designator U3)
U3_Cell19 "INA826AIDGK" INA826AIDGK 38,35 r90 top (schematic designator U3)
U3_Cell20 "INA826AIDGK" INA826AIDGK 28,35 r90 top (schematic designator U3)
U3_Cell21 "INA826AIDGK" INA826AIDGK 68,25 r90 top (schematic designator U3)
U3_Cell22 "INA826AIDGK" INA826AIDGK 58,25 r90 top (schematic designator U3)
U3_Cell23 "INA826AIDGK" INA826AIDGK 48,25 r90 top (schematic designator U3)
U3_Cell24 "INA826AIDGK" INA826AIDGK 38,25 r90 top (schematic designator U3)
U3_Cell25 "INA826AIDGK" INA826AIDGK 28,25 r90 top (schematic designator U3)

## Footprints (in the part's own frame and the unit in brackets; to place one, negate y for a bottom-side part, rotate by r counter-clockwise, add the part's x,y. Pads: shape width x height; smd on the part's side, far side on the other; paste and mask are expansions set on the pad)
CAP_0402 [mm] "Chip Capacitor, 2-Leads, Body 1.02x0.51mm, IPC Medium Density"
  rect 0.6x0.64 smd mask+0.051: 1(-0.44,0) 2(0.44,0)
  body extent -0.5,-0.26 0.5,0.26, height 0.52
D-SUB_26 [mm] "26 pins, right angled"
  rect 1.5x1.5 hole 1: 1(8.63,5.82)
  round 1.5 hole 1: 2(6.34,5.82) 3(4.05,5.82) 4(1.76,5.82) 5(-0.53,5.82) 6(-2.82,5.82) 7(-5.11,5.82) 8(-7.4,5.82) 9(-9.69,5.82) 10(9.77,3.28) 11(7.48,3.28) 12(5.19,3.28) 13(2.9,3.28) 14(0.61,3.28) 15(-1.68,3.28) 16(-3.97,3.28) 17(-6.26,3.28) 18(-8.55,3.28) 19(8.63,0.74) 20(6.34,0.74) 21(4.05,0.74) 22(1.76,0.74) 23(-0.53,0.74) 24(-2.82,0.74) 25(-5.11,0.74) 26(-7.4,0.74)
  round 4.8 hole 3.2: M1(-16.65,3.28) M2(16.65,3.28)
  body extent -19.6,-14.15 19.6,8.15, height 12.55
HMC1053 [mm]
  rect 1.52x0.65 smd mask+0.064: 1(-3.123,1.905) 2(-3.123,0.635) 3(-3.123,-0.635) 4(-3.123,-1.905) 9(3.123,-1.905) 10(3.123,-0.635) 11(3.123,0.635) 12(3.123,1.905)
  rect 0.65x1.52 smd mask+0.064: 5(-1.905,-3.124) 6(-0.635,-3.124) 7(0.635,-3.124) 8(1.905,-3.124) 13(1.905,3.124) 14(0.635,3.124) 15(-0.635,3.124) 16(-1.905,3.124)
  silkscreen extent -4.65,-3.78 3.78,3.78, body extent -3.73,-3.73 3.73,3.73, height 2.81
INA826AIDGK [mm] "TSOP, 8-Leads, Body 3.1x3.1mm, Pitch 0.65mm, IPC High Density"
  rrect22% 1.15x0.45 smd mask+0.07: 1(-2.125,0.975) 2(-2.125,0.325) 3(-2.125,-0.325) 4(-2.125,-0.975) 5(2.125,-0.975) 6(2.125,-0.325) 7(2.125,0.325) 8(2.125,0.975)
  silkscreen extent -1.15,-1.55 1.15,1.55, body extent -2.45,-1.5 2.45,1.5, height 0.94
MUX509IPW [mm]
  rrect22% 1.5x0.45 smd paste+0 mask+0.051: 1(-2.9,2.275) 2(-2.9,1.625) 3(-2.9,0.975) 4(-2.9,0.325) 5(-2.9,-0.325) 6(-2.9,-0.975) 7(-2.9,-1.625) 8(-2.9,-2.275) 9(2.9,-2.275) 10(2.9,-1.625) 11(2.9,-0.975) 12(2.9,-0.325) 13(2.9,0.325) 14(2.9,0.975) 15(2.9,1.625) 16(2.9,2.275)
  silkscreen extent -4.37,-2.55 1.78,2.55, body extent -3.75,-2.8 3.75,2.8, height 0.25
RES_0402 [mm] "Chip Resistor, 2-Leads, Body 1.0x0.5mm, IPC High Density"
  rect 0.7x0.6 smd mask+0.051: 1(-0.45,0) 2(0.45,0)
  body extent -0.5,-0.25 0.5,0.25, height 0.35

## Part data
C1_Cell1 C1_Cell2 C1_Cell3 C1_Cell4 C1_Cell5 C1_Cell6 C1_Cell7 C1_Cell8 C1_Cell9 C1_Cell10 C1_Cell11 C1_Cell12 C1_Cell13 C1_Cell14 C1_Cell15 C1_Cell16 C1_Cell17 C1_Cell18 C1_Cell19 C1_Cell20 C1_Cell21 C1_Cell22 C1_Cell23 C1_Cell24 C1_Cell25 C2_Cell1 C2_Cell2 C2_Cell3 C2_Cell4 C2_Cell5 C2_Cell6 C2_Cell7 C2_Cell8 C2_Cell9 C2_Cell10 C2_Cell11 C2_Cell12 C2_Cell13 C2_Cell14 C2_Cell15 C2_Cell16 C2_Cell17 C2_Cell18 C2_Cell19 C2_Cell20 C2_Cell21 C2_Cell22 C2_Cell23 C2_Cell24 C2_Cell25: library part CAP_0402, "Capacitor SMD 0402", Voltage=50V, Capacitance=1u
J2: "Female High Density PCB Connector with Hex Screw WR-DSUB, Angled, 26 pins", Contact Resistance=30mOhm, Manufacturer="Wurth Elektronik", Operating Temperature=-40to85degC, Package Reference=618026330923, Rated Current=3A, Working Voltage=60VAC, Datasheet URL=https://katalog.we-online.de/em/datasheet/6180xx330923.pdf, Gender=Female, Manufacturer URL=http://www.we-online.de, Mounting Technology=THT, Orientation=Angled, Packaging=Tray, Part Number=618026330923, Pin Number=26, Publisher=WurthElektronik
R1_Cell1 R1_Cell2 R1_Cell3 R1_Cell4 R1_Cell5 R1_Cell6 R1_Cell7 R1_Cell8 R1_Cell9 R1_Cell10 R1_Cell11 R1_Cell12 R1_Cell13 R1_Cell14 R1_Cell15 R1_Cell16 R1_Cell17 R1_Cell18 R1_Cell19 R1_Cell20 R1_Cell21 R1_Cell22 R1_Cell23 R1_Cell24 R1_Cell25: library part RES_0402, "Resistor SMD 0402", Resistance=249R
U1_Cell1 U1_Cell2 U1_Cell3 U1_Cell4 U1_Cell5 U1_Cell6 U1_Cell7 U1_Cell8 U1_Cell9 U1_Cell10 U1_Cell11 U1_Cell12 U1_Cell13 U1_Cell14 U1_Cell15 U1_Cell16 U1_Cell17 U1_Cell18 U1_Cell19 U1_Cell20 U1_Cell21 U1_Cell22 U1_Cell23 U1_Cell24 U1_Cell25: "3-axis magnetoresistive sensor", Case/Package=PLCC, Manufacturer=Honeywell, Max Operating Temperature=125°C, Max Supply Voltage=20V, Min Operating Temperature=-40°C, Min Supply Voltage=1.8V, Nominal Supply Current=500mA, Operating Supply Voltage=3V, Package Quantity=66, Axis="X, Y, Z", Bandwidth=5MHz, Category="Magnetic Sensors", ComponentLink1Description=https://datasheet.ciiva.com/15099/getdatasheetpartid-59250-15099355.pdf?src-supplier=Verical, ComponentLink1URL=https://datasheet.ciiva.com/15099/getdatasheetpartid-59250-15099355.pdf?src-supplier=Verical, ComponentLink2Description=https://datasheet.ciiva.com/2816/hmc-1051-1052-1053-data-sheet-2816521.pdf?src-supplier=Digi-Key, ComponentLink2URL=https://datasheet.ciiva.com/2816/hmc-1051-1052-1053-data-sheet-2816521.pdf?src-supplier=Digi-Key, Height=2.5mm, Length=7.4mm, Manufacturer Part Number=HMC1053, Number of Pins=16, Output Type="Wheatstone Bridge", Packaging="Tape and Reel", Radiation Hardening=No, RoHS=No, Sensing Method=Magnetoresistive, Supplier 1=Newark, Width=7.4mm
U2_Cell1 U2_Cell2 U2_Cell3 U2_Cell4 U2_Cell5 U2_Cell6 U2_Cell7 U2_Cell8 U2_Cell9 U2_Cell10 U2_Cell11 U2_Cell12 U2_Cell13 U2_Cell14 U2_Cell15 U2_Cell16 U2_Cell17 U2_Cell18 U2_Cell19 U2_Cell20 U2_Cell21 U2_Cell22 U2_Cell23 U2_Cell24 U2_Cell25: "IC MUX DUAL 4:1 170 OHM 16TSSOP", Case/Package=TSSOP, Max Operating Temperature=125°C, Min Operating Temperature=-40°C, On-State Resistance=250R, Lead Free="Lead Free", Number of Channels=2, Number of Circuits=4, Number of Pins=16, Packaging="Cut Tape", REACH SVHC="No SVHC", RoHS Compliant=Yes
U3_Cell1 U3_Cell2 U3_Cell3 U3_Cell4 U3_Cell5 U3_Cell6 U3_Cell7 U3_Cell8 U3_Cell9 U3_Cell10 U3_Cell11 U3_Cell12 U3_Cell13 U3_Cell14 U3_Cell15 U3_Cell16 U3_Cell17 U3_Cell18 U3_Cell19 U3_Cell20 U3_Cell21 U3_Cell22 U3_Cell23 U3_Cell24 U3_Cell25: "Precision, 200-uA Supply Current, 36-V Supply Instrumentation Amplifier, -40 to 125 degC, 8-pin SOP (DGK8), Green (RoHS & no Sb/Br)", Input Bias Current (+/-)(Max)(nA)=65, Manufacturer="Texas Instruments", Quiescent Current (+/-)(Typ)(mA)=0.2, CMRR(Min)(dB)=84, Code_JEDEC=MO-187, ComponentLink1Description="Manufacturer URL", ComponentLink1URL=http://www.ti.com/, ComponentLink2Description=Datasheet, ComponentLink2URL=http://www.ti.com/general/docs/lit/getliterature.tsp?genericPartNumber=INA826&fileType=pdf, ComponentLink3Description="Package Specification", ComponentLink3URL=http://www.ti.com/litv/pdf/mpds028d, DatasheetVersion=SBOS562E, Eco-Plan="Green (RoHS & no Sb/Br)", Gain(V/V)="1 to 1000", Input Offset (+/-)(Max)(uV)=150, Input Offset Drift (+/-)(Max)(uV/Degrees Celsius)=2, Mounting Technology="Surface Mount", Noise at 1kHz(Typ)(nV/rt(Hz))=18, Non-Linearity (+/-)(Max)(%)=0.0005, Number of Channels=1, Output Offset (+/-)(Max)(uV)=700, Output Offset Drift (+/-)(Max)(uV/Degrees Celsius)=10, PackageDescription="8-Pin Thin Small Outline, Body 3 x 3 mm, Pitch 0.65 mm", PackageReference=DGK0008A, PackageVersion="4073329/E, 05/2006", PartNumber=INA826AIDGK, SubFamily="Single Supply", Vs(Max)(V)=36, Vs(Min)(V)=2.7

## Via types
v1: diameter 0.5, hole 0.2, Top Layer (Signal) to Bottom Layer (Signal), 350 vias

## Nets (pads, with @x,y where several pads share a name; then routed paths per layer and width w, separated by ;. In a path a pad name is that pad's centre, name@x,y a point inside that pad or via, vN(x,y) a via of type N, cw(c..) or ccw(c..) an arc to the next point about the centre after c; other vN are vias at no path point)
A0: U2_Cell1.1 U2_Cell2.1 U2_Cell3.1 U2_Cell4.1 U2_Cell5.1 U2_Cell6.1 U2_Cell7.1 U2_Cell8.1 U2_Cell9.1 U2_Cell10.1 U2_Cell11.1 U2_Cell12.1 U2_Cell13.1 U2_Cell14.1 U2_Cell15.1 U2_Cell16.1 U2_Cell17.1 U2_Cell18.1 U2_Cell19.1 U2_Cell20.1 U2_Cell21.1 U2_Cell22.1 U2_Cell23.1 U2_Cell24.1 U2_Cell25.1 | length 50.3
  Top Layer (Signal) w0.3: v1(20.6,24) 20.6,23.946 20.725,23.821 20.725,22.25 20.65,22.175 U2_Cell25.1@20.725,22.1 ; v1(20.6,34) 20.6,33.946 20.725,33.821 20.725,32.25 20.65,32.175 U2_Cell20.1@20.725,32.1 ; v1(20.6,44) 20.6,43.946 20.725,43.821 20.725,42.25 20.65,42.175 U2_Cell15.1@20.725,42.1 ; v1(20.6,54) 20.6,53.946 20.725,53.821 20.725,52.25 20.65,52.175 U2_Cell10.1@20.725,52.1 ; v1(20.6,64) 20.6,63.946 20.725,63.821 20.725,62.25 20.65,62.175 U2_Cell5.1@20.725,62.1 ; v1(30.6,24) 30.6,23.946 30.725,23.821 30.725,22.25 30.65,22.175 U2_Cell24.1@30.725,22.1 ; v1(30.6,34) 30.6,33.946 30.725,33.821 30.725,32.25 30.65,32.175 U2_Cell19.1@30.725,32.1 ; v1(30.6,44) 30.6,43.946 30.725,43.821 30.725,42.25 30.65,42.175 U2_Cell14.1@30.725,42.1 ; v1(30.6,54) 30.6,53.946 30.725,53.821 30.725,52.25 30.65,52.175 U2_Cell9.1@30.725,52.1 ; v1(30.6,64) 30.6,63.946 30.725,63.821 30.725,62.25 30.65,62.175 U2_Cell4.1@30.725,62.1 ; v1(40.6,24) 40.6,23.946 40.725,23.821 40.725,22.25 40.65,22.175 U2_Cell23.1@40.725,22.1 ; v1(40.6,34) 40.6,33.946 40.725,33.821 40.725,32.25 40.65,32.175 U2_Cell18.1@40.725,32.1 ; v1(40.6,44) 40.6,43.946 40.725,43.821 40.725,42.25 40.65,42.175 U2_Cell13.1@40.725,42.1 ; v1(40.6,54) 40.6,53.946 40.725,53.821 40.725,52.25 40.65,52.175 U2_Cell8.1@40.725,52.1 ; v1(40.6,64) 40.6,63.946 40.725,63.821 40.725,62.25 40.65,62.175 U2_Cell3.1@40.725,62.1 ; v1(50.6,24) 50.6,23.946 50.725,23.821 50.725,22.25 50.65,22.175 U2_Cell22.1@50.725,22.1 ; v1(50.6,34) 50.6,33.946 50.725,33.821 50.725,32.25 50.65,32.175 U2_Cell17.1@50.725,32.1 ; v1(50.6,44) 50.6,43.946 50.725,43.821 50.725,42.25 50.65,42.175 U2_Cell12.1@50.725,42.1 ; v1(50.6,54) 50.6,53.946 50.725,53.821 50.725,52.25 50.65,52.175 U2_Cell7.1@50.725,52.1 ; v1(50.6,64) 50.6,63.946 50.725,63.821 50.725,62.25 50.65,62.175 U2_Cell2.1@50.725,62.1 ; v1(60.6,24) 60.6,23.946 60.725,23.821 60.725,22.25 60.65,22.175 U2_Cell21.1@60.725,22.1 ; v1(60.6,34) 60.6,33.946 60.725,33.821 60.725,32.25 60.65,32.175 U2_Cell16.1@60.725,32.1 ; v1(60.6,44) 60.6,43.946 60.725,43.821 60.725,42.25 60.65,42.175 U2_Cell11.1@60.725,42.1 ; v1(60.6,54) 60.6,53.946 60.725,53.821 60.725,52.25 60.65,52.175 U2_Cell6.1@60.725,52.1 ; v1(60.6,64) 60.6,63.946 60.725,63.821 60.725,62.25 60.65,62.175 U2_Cell1.1@60.725,62.1
A1: U2_Cell1.16 U2_Cell2.16 U2_Cell3.16 U2_Cell4.16 U2_Cell5.16 U2_Cell6.16 U2_Cell7.16 U2_Cell8.16 U2_Cell9.16 U2_Cell10.16 U2_Cell11.16 U2_Cell12.16 U2_Cell13.16 U2_Cell14.16 U2_Cell15.16 U2_Cell16.16 U2_Cell17.16 U2_Cell18.16 U2_Cell19.16 U2_Cell20.16 U2_Cell21.16 U2_Cell22.16 U2_Cell23.16 U2_Cell24.16 U2_Cell25.16 | length 51.4
  Top Layer (Signal) w0.3: v1(20.6,26) 20.6,26.054 20.725,26.179 U2_Cell25.16@20.725,27.9 U2_Cell25.16@20.65,27.825 ; v1(20.6,36) 20.6,36.054 20.725,36.179 U2_Cell20.16@20.725,37.9 U2_Cell20.16@20.65,37.825 ; v1(20.6,46) 20.6,46.054 20.725,46.179 U2_Cell15.16@20.725,47.9 U2_Cell15.16@20.65,47.825 ; v1(20.6,56) 20.6,56.054 20.725,56.179 U2_Cell10.16@20.725,57.9 U2_Cell10.16@20.65,57.825 ; v1(20.6,66) 20.6,66.054 20.725,66.179 U2_Cell5.16@20.725,67.9 U2_Cell5.16@20.65,67.825 ; v1(30.6,26) 30.6,26.054 30.725,26.179 U2_Cell24.16@30.725,27.9 U2_Cell24.16@30.65,27.825 ; v1(30.6,36) 30.6,36.054 30.725,36.179 U2_Cell19.16@30.725,37.9 U2_Cell19.16@30.65,37.825 ; v1(30.6,46) 30.6,46.054 30.725,46.179 U2_Cell14.16@30.725,47.9 U2_Cell14.16@30.65,47.825 ; v1(30.6,56) 30.6,56.054 30.725,56.179 U2_Cell9.16@30.725,57.9 U2_Cell9.16@30.65,57.825 ; v1(30.6,66) 30.6,66.054 30.725,66.179 U2_Cell4.16@30.725,67.9 U2_Cell4.16@30.65,67.825 ; v1(40.6,26) 40.6,26.054 40.725,26.179 U2_Cell23.16@40.725,27.9 U2_Cell23.16@40.65,27.825 ; v1(40.6,36) 40.6,36.054 40.725,36.179 U2_Cell18.16@40.725,37.9 U2_Cell18.16@40.65,37.825 ; v1(40.6,46) 40.6,46.054 40.725,46.179 U2_Cell13.16@40.725,47.9 U2_Cell13.16@40.65,47.825 ; v1(40.6,56) 40.6,56.054 40.725,56.179 U2_Cell8.16@40.725,57.9 U2_Cell8.16@40.65,57.825 ; v1(40.6,66) 40.6,66.054 40.725,66.179 U2_Cell3.16@40.725,67.9 U2_Cell3.16@40.65,67.825 ; v1(50.6,26) 50.6,26.054 50.725,26.179 U2_Cell22.16@50.725,27.9 U2_Cell22.16@50.65,27.825 ; v1(50.6,36) 50.6,36.054 50.725,36.179 U2_Cell17.16@50.725,37.9 U2_Cell17.16@50.65,37.825 ; v1(50.6,46) 50.6,46.054 50.725,46.179 U2_Cell12.16@50.725,47.9 U2_Cell12.16@50.65,47.825 ; v1(50.6,56) 50.6,56.054 50.725,56.179 U2_Cell7.16@50.725,57.9 U2_Cell7.16@50.65,57.825 ; v1(50.6,66) 50.6,66.054 50.725,66.179 U2_Cell2.16@50.725,67.9 U2_Cell2.16@50.65,67.825 ; v1(60.6,26) 60.6,26.054 60.725,26.179 U2_Cell21.16@60.725,27.9 U2_Cell21.16@60.65,27.825 ; v1(60.6,36) 60.6,36.054 60.725,36.179 U2_Cell16.16@60.725,37.9 U2_Cell16.16@60.65,37.825 ; v1(60.6,46) 60.6,46.054 60.725,46.179 U2_Cell11.16@60.725,47.9 U2_Cell11.16@60.65,47.825 ; v1(60.6,56) 60.6,56.054 60.725,56.179 U2_Cell6.16@60.725,57.9 U2_Cell6.16@60.65,57.825 ; v1(60.6,66) 60.6,66.054 60.725,66.179 U2_Cell1.16@60.725,67.9 U2_Cell1.16@60.65,67.825